# EAGLE board sebix_board (EAGLE 9.6.2)
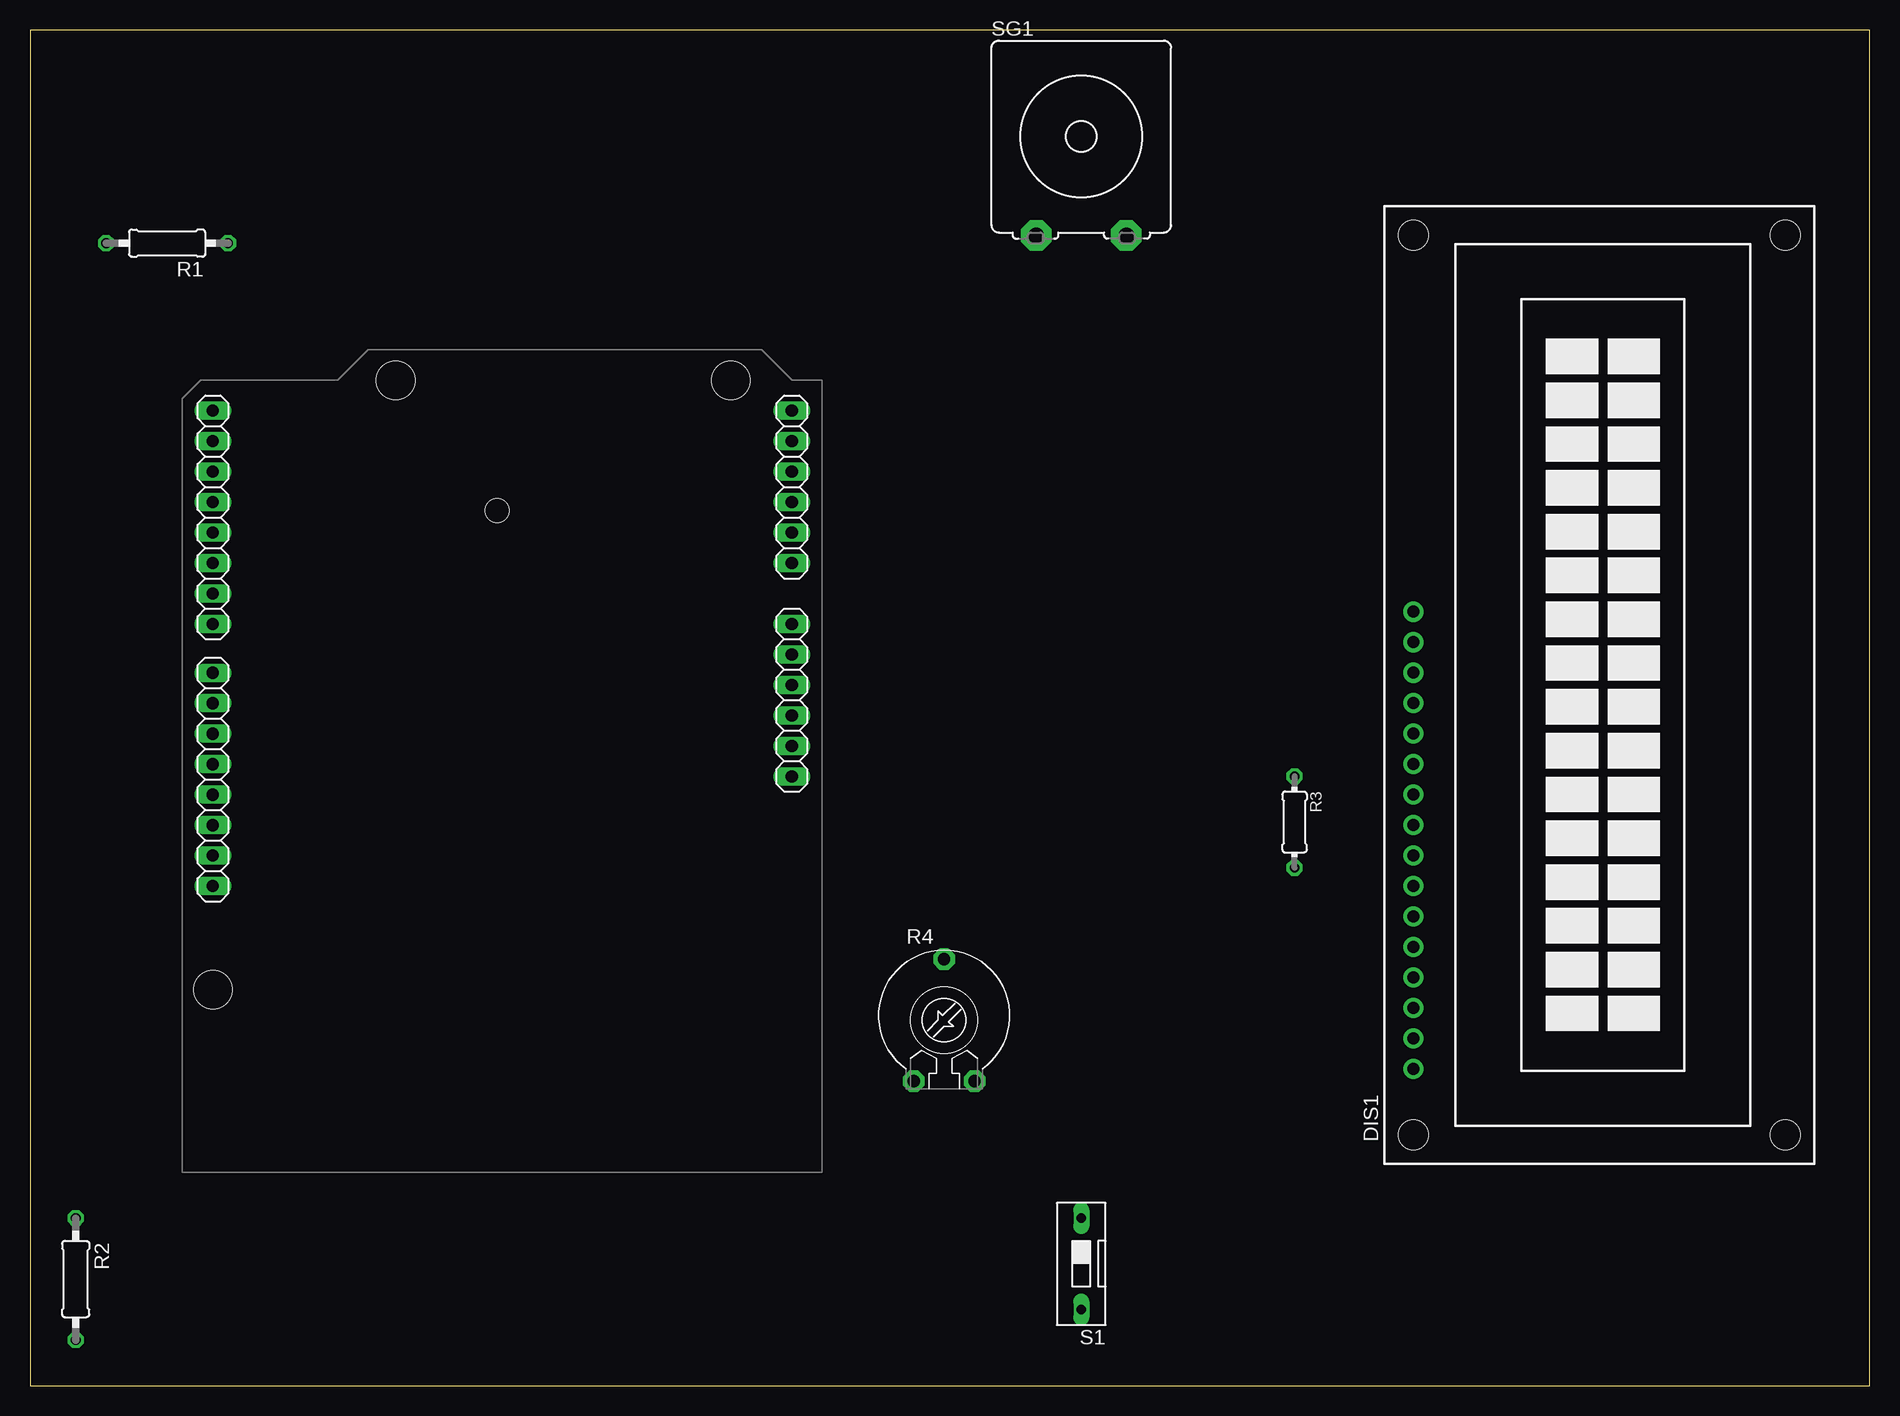
[diagram p0: board, top side]
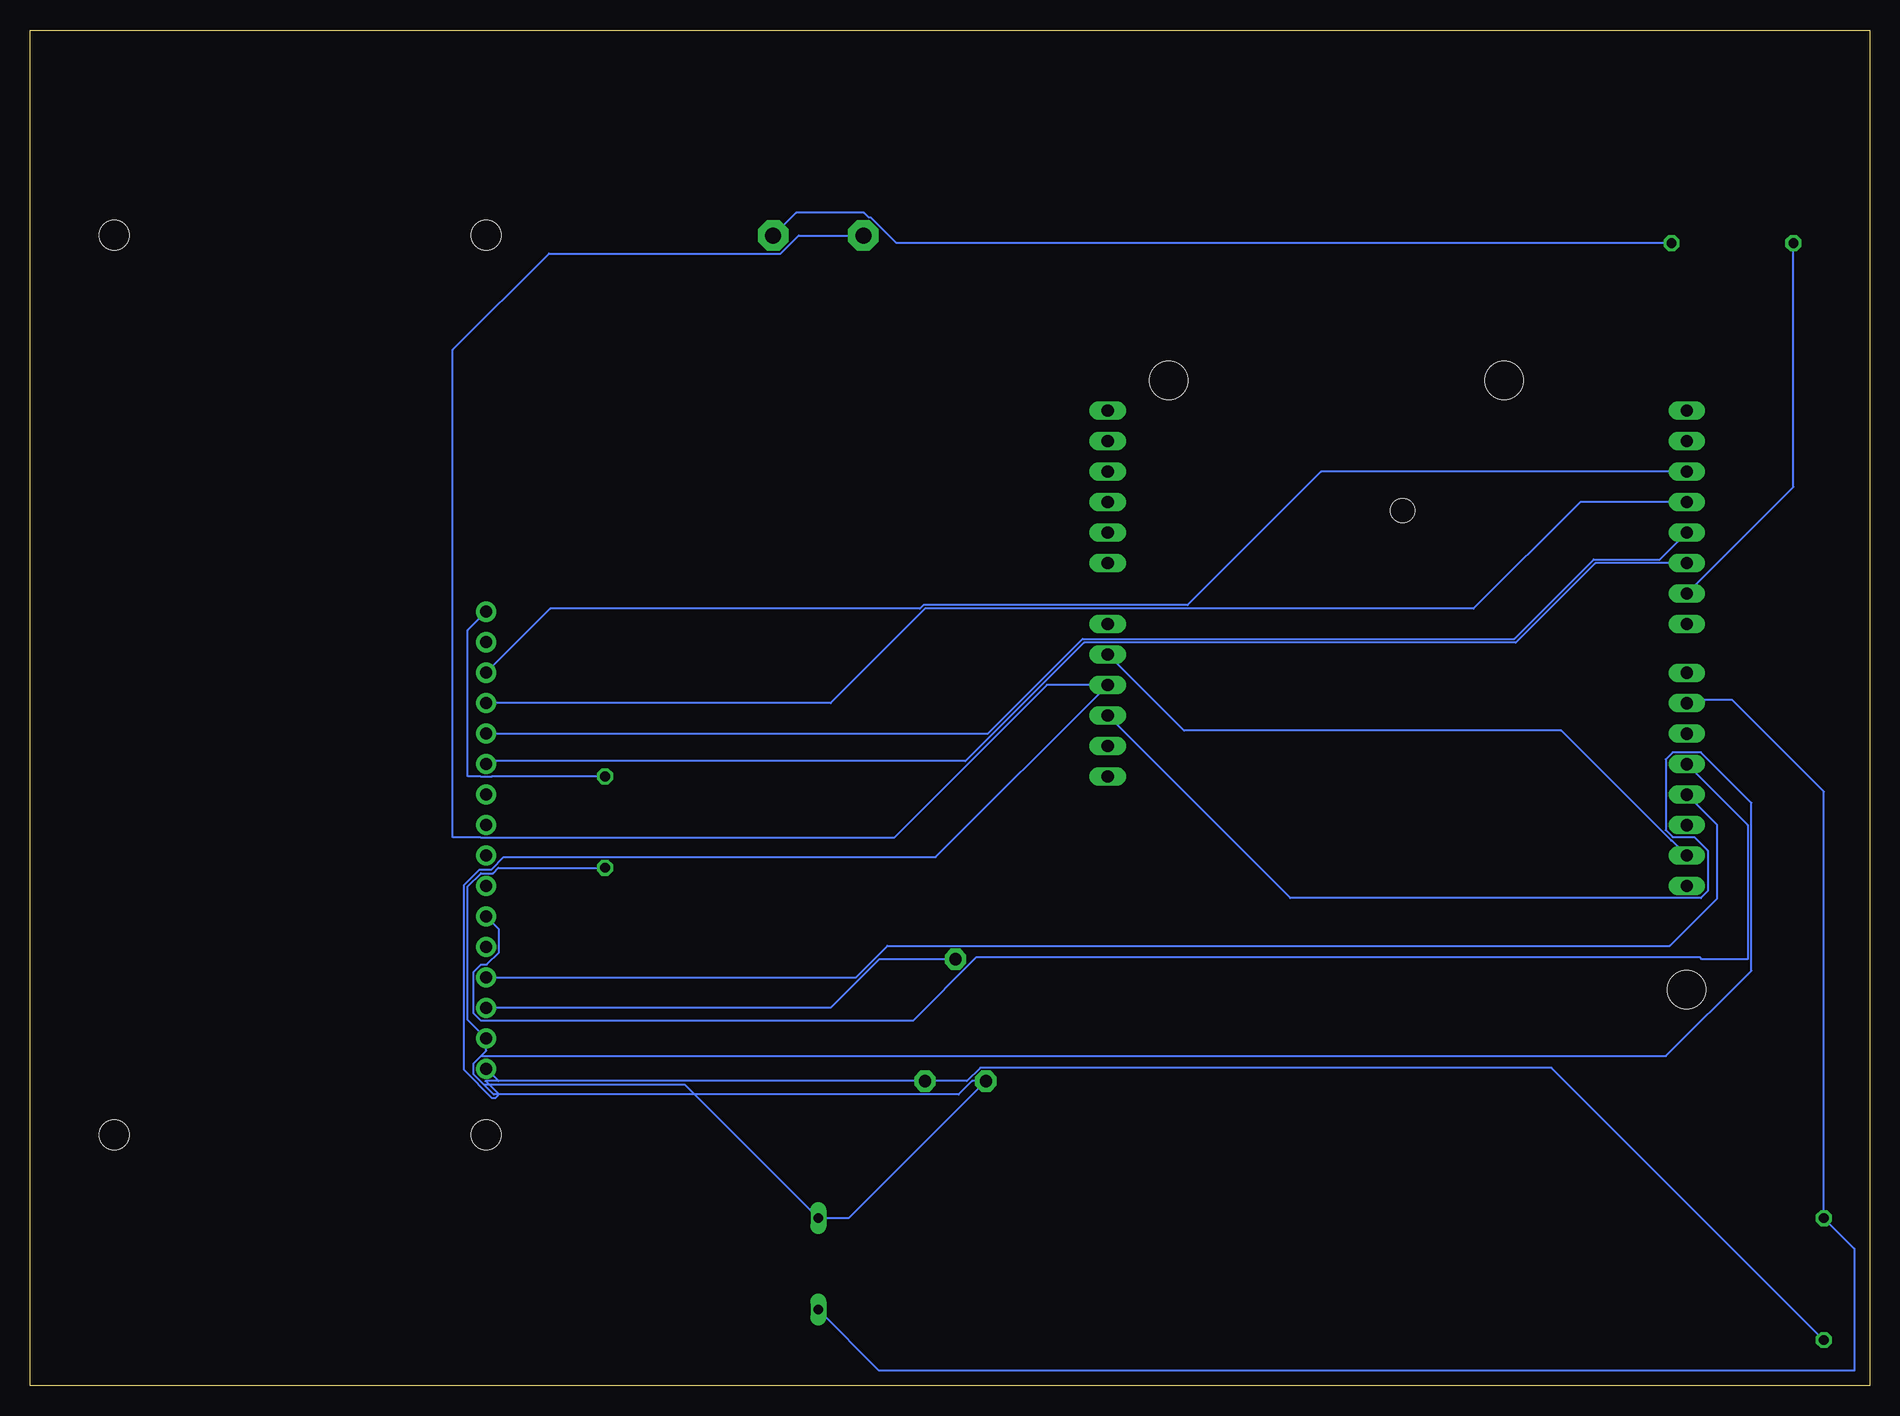
[diagram p1: board, bottom side, seen from below]

Size 153.34 x 113.02 mm. Coordinates in mm from the lower left corner, seen from the top.
Outline: 0,0 153.34,0 153.34,113.02 0,113.02 0,0
Copper layers (1*16): Top 0.035mm / dielectric 1.5mm / Bottom 0.035mm
Design rules "default": minimum track width 6mil, minimum drill 0.35mm, track to track 6mil, track to pad 6mil, pad to pad 6mil, via to via 6mil, smd to smd 6mil, copper to edge 40mil, drill to drill 6mil, minimum pad ring 10mil, minimum via ring 8mil, stop-mask expansion 4mil, vias tented up to drill 0mil, thermal gap 10mil

## Footprints (pad centres in the part's own frame; a part is rotated, then mirrored left to right if it is on the bottom)
TUXGR_16X2_R2 = drill 1 pad 1.676: 1 -32,15.5; 2 -29.46,15.5; 3 -26.92,15.5; 4 -24.38,15.5; 5 -21.84,15.5; 6 -19.3,15.5; 7 -16.76,15.5; 8 -14.22,15.5; 9 -11.68,15.5; 10 -9.14,15.5; 11 -6.6,15.5; 12 -4.06,15.5; 13 -1.52,15.5; 14 1.02,15.5; 15 3.56,15.5; 16 6.1,15.5 | hole 2.5: -37.5,-15.5; 37.5,-15.5; -37.5,15.5; 37.5,15.5
ARDUINO2009 = drill 1.016 long: 1 33.02,2.54; 2 35.56,2.54; 3 38.1,2.54; 4 40.64,2.54; 5 43.18,2.54; 6 45.72,2.54; 7 50.8,2.54; 8 53.34,2.54; 9 55.88,2.54; 10 58.42,2.54; 11 60.96,2.54; 12 63.5,2.54; 13 63.5,50.8; 14 60.96,50.8; 15 58.42,50.8; 16 55.88,50.8; 17 53.34,50.8; 18 50.8,50.8; 19 48.26,50.8; 20 45.72,50.8; 21 41.656,50.8; 22 39.116,50.8; 23 36.576,50.8; 24 34.036,50.8; 25 31.496,50.8; 26 28.956,50.8; 27 26.416,50.8; 28 23.876,50.8 | hole 3.2: 15.24,50.8; 66.04,35.56; 66.04,7.62 | hole 2: 55.17,27.114
0207/10 = drill 0.813 octagon: 1 -5.08,0; 2 5.08,0
0204/7 = drill 0.813 octagon: 1 -3.81,0; 2 3.81,0
PT-10 = drill 1.016 pad 1.778 octagon: 1 -2.54,-5.08; 2 2.54,-5.08; 3 0,5.08
DS-01 = drill 0.813 long: 1 0,-3.81; 2 0,3.81
B/C11L = drill 1.321 pad 2.54 octagon: 1 -3.759,-8.255; 2 3.759,-8.255

## Placement (x,y rotation side)
DIS1  TUXGR_16X2_R2  [TUXGR_16X2_R2]  130.81,58.42 90 top
IC1  [ARDUINO2009]  66.04,17.78 90 top
R1  [0207/10]  11.43,95.25 180 top
R2  [0207/10]  3.81,8.89 270 top
R3  [0204/7]  105.41,46.99 270 top
R4  [PT-10]  76.2,30.48 0 top
S1  [DS-01]  87.63,10.16 180 top
SG1  B/C11L  [B/C11L]  87.63,104.14 0 top

## Library data of the parts
DIS1 = display-lcd; OC_FARNELL: unknown; OC_NEWARK: unknown
IC1 = arduino
R1-R3 = rcl; SPICEPREFIX: R
R4 = rcl; SPICEMODEL: POT; SPICEPREFIX: X
S1 = switch-dil; OC_FARNELL: unknown; OC_NEWARK: unknown
SG1 = buzzer; OC_FARNELL: unknown; OC_NEWARK: unknown

## Nets
5V: DIS1.2 IC1.3 R3.2 R4.1 S1.1
+3V3: IC1.2
GND: IC1.5 IC1.27
N$1: DIS1.16 R3.1
N$2: DIS1.3 R4.3
N$4: R1.1 SG1.2
N$5: DIS1.4 IC1.25
N$6: DIS1.6 IC1.24
N$7: DIS1.11 IC1.18
N$8: DIS1.12 IC1.17
N$9: IC1.19 R1.2
N$10: DIS1.13 IC1.16
N$11: DIS1.14 IC1.15
N$12: IC1.22 R2.1 S1.2
N$13: DIS1.1 IC1.4 R2.2 R4.2 SG1.1

## Tracks (layer width: path | path; a pad name or v marks a point on that pad's centre or on a via)
5V
  Bottom 0.152: 115.49,25.1 98.75,25.1 S1.1 85.09,13.97 R4.1 74.81,25.4 75.93,24.28 114.68,24.28 115.49,25.1 | 115.75,27.49 115.31,27.93 DIS1.2 116.84,30.49 116.84,41.64 115.75,42.73 114.75,42.73 114.3,43.18 R3.2 | 115.75,27.49 116.38,26.86 116.38,25.98 115.49,25.1 | IC1.3 48.29,40.67 14.07,40.67 13.49,41.25 13.49,44.61 14.63,45.75 16.41,45.75 16.99,46.33 16.99,52.23 16.41,52.81 14.07,52.81 9.86,48.59 9.86,34.6 16.97,27.49 115.75,27.49
GND
  Bottom 0.152: IC1.27 16.48,45.44 16.54,45.44 25.71,54.61 57.15,54.61 IC1.5
N$1
  Bottom 0.152: R3.1 114.82,50.8 114.87,50.75 115.75,50.75 115.8,50.8 116.84,50.8 116.84,62.99 DIS1.16
N$2
  Bottom 0.152: R4.3 82.55,35.56 86.61,31.5 DIS1.3
N$4
  Bottom 0.152: R1.1 81.12,95.25 83.25,97.38 83.41,97.38 83.82,97.79 89.48,97.79 SG1.2
N$5
  Bottom 0.152: DIS1.4 84.5,34.04 81.86,36.68 16.66,36.68 12.7,40.64 12.7,46.74 IC1.25
N$6
  Bottom 0.152: IC1.24 10.16,46.74 10.16,35.56 13.97,35.56 14.12,35.71 74.47,35.71 79.75,30.43 115.75,30.43 116.38,31.06 116.38,34.48 115.75,35.11 115.28,35.11 114.24,36.14 114.24,38.05 DIS1.6
N$7
  Bottom 0.152: IC1.18 22.86,68.58 29.49,61.95 65.48,61.95 75.36,52.07 115.06,52.07 DIS1.11
N$8
  Bottom 0.152: DIS1.12 73.5,54.36 65.61,62.26 29.62,62.26 22.99,68.88 17.48,68.88 IC1.17
N$9
  Bottom 0.152: IC1.19 6.35,74.93 R1.2
N$10
  Bottom 0.152: IC1.16 24.13,73.66 33.02,64.77 78.74,64.77 86.61,56.9 DIS1.13
N$11
  Bottom 0.152: IC1.15 45.72,76.2 56.84,65.08 78.87,65.08 79.17,64.77 109.98,64.77 DIS1.14
N$12
  Bottom 0.152: S1.2 82.55,1.27 1.27,1.27 1.27,11.43 R2.1 3.81,49.53 11.43,57.15 15.24,57.15 IC1.22
N$13
  Bottom 0.152: R4.2 75.24,25.4 74.12,26.52 26.52,26.52 R2.2 | R4.2 114.29,25.4 DIS1.1 | R4.2 115.37,25.4 114.38,24.41 114.38,24.16 114.56,23.98 114.81,23.98 117.14,26.32 117.14,41.77 115.88,43.03 114.88,43.03 113.84,44.07 77.85,44.07 IC1.4 68.58,58.42 81.33,45.67 115.75,45.67 115.8,45.72 118.11,45.72 118.11,86.36 110.08,94.39 90.77,94.39 89.27,95.89 SG1.1